# EAGLE board 4-pin-rocketbus (EAGLE 5.11)
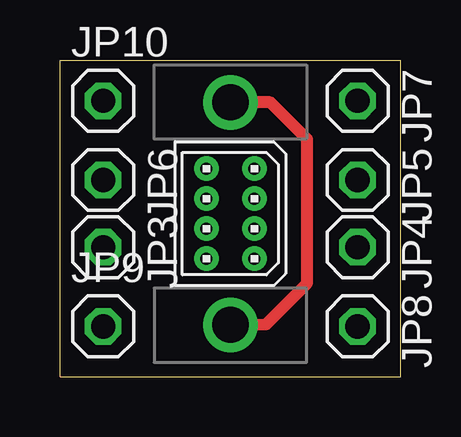
[diagram p0: board, top side]
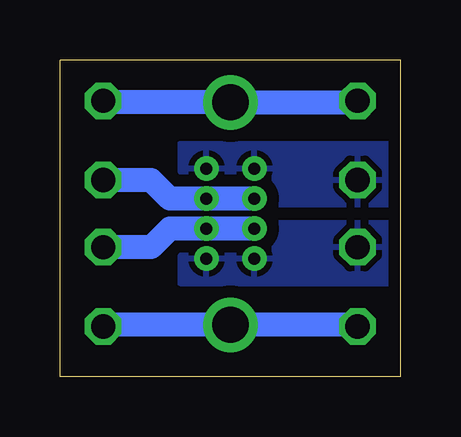
[diagram p1: board, bottom side, seen from below]

Size 14.2 x 13.2 mm. Coordinates in mm from the lower left corner, seen from the top.
Outline: 0,0 14.2,0 14.2,13.2 0,13.2 0,0
Copper layers (1*16): Top 0.0178mm / dielectric 1.4986mm / Bottom 0.0178mm
Design rules "sunstone_eagle_2lyr_rules_v1.0.0.3": minimum track width 6mil, minimum drill 14mil, track to track 6mil, track to pad 6mil, pad to pad 6mil, via to via 6mil, smd to smd 6mil, copper to edge 20mil, drill to drill 16mil, minimum pad ring 8mil, minimum via ring 8mil, stop-mask expansion 3mil, vias tented up to drill 0mil, thermal gap 10mil

## Footprints (pad centres in the part's own frame; a part is rotated, then mirrored left to right if it is on the bottom)
USB-FEMALE_PKG = drill 0.508 pad 1.016 round: 1 1,-1.875; 2 -1,-1.875; 3 1,-0.625; 4 -1,-0.625; 5 1,0.625; 6 -1,0.625; 7 1,1.875; 8 -1,1.875 | drill 1.511 round: CHASSIS@1 0,4.636; CHASSIS@2 0,-4.636
1X01 = drill 1.016 octagon: 1 0,0

## Placement (x,y rotation side)
J3  PSAS-USB-FEMALE-CONNECTOR  [USB-FEMALE_PKG]  7.1,6.8 0 top
JP3  [1X01]  1.8,5.4 270 top
JP4  [1X01]  12.4,5.4 270 top
JP5  [1X01]  12.4,8.2 270 top
JP6  [1X01]  1.8,8.2 270 top
JP7  [1X01]  12.4,11.5 270 top
JP8  [1X01]  12.4,2.1 270 top
JP9  [1X01]  1.8,2.1 0 top
JP10  [1X01]  1.8,11.5 0 top

## Library data of the parts
J3 = usb-connector
JP3-JP10 = pinhead

## Nets
N$11: J3.CHASSIS@1 J3.CHASSIS@2 JP7.1 JP8.1 JP9.1 JP10.1
USB_5V: J3.1 J3.2 JP3.1
USB_GND: J3.7 J3.8 JP6.1
USB_H: J3.3 J3.4 JP4.1
USB_L: J3.5 J3.6 JP5.1

## Tracks (layer width: path | path; a pad name or v marks a point on that pad's centre or on a via)
N$11
  Top 0.5: J3.CHASSIS@2 8.6,2.2 10.3,3.9 10.3,9.9 8.76,11.44 J3.CHASSIS@1
  Bottom 1: JP10.1 1.86,11.44 J3.CHASSIS@1 12.34,11.44 JP7.1 | JP8.1 12.34,2.16 J3.CHASSIS@2 1.86,2.16 JP9.1
USB_5V
  pour Bottom (isolate 0.5): 0,6.4 9.2,6.4 9.2,3.9 0,3.9
USB_GND
  pour Bottom (isolate 0.5): 0,7.2 0,9.7 9.2,9.7 9.2,7.2
USB_H
  Bottom 0.3: 10.4,5.4 12.3,5.4 12.4,5.5 JP4.1
  Bottom 1: J3.4 J3.3 9.62,6.17 10.4,5.4 JP4.1
USB_L
  Bottom 0.3: JP5.1 12.5,8.2
  Bottom 1: J3.6 J3.5 9.62,7.42 10.4,8.2 JP5.1